# EAGLE board LCD-Header-2pins (EAGLE 5.11)
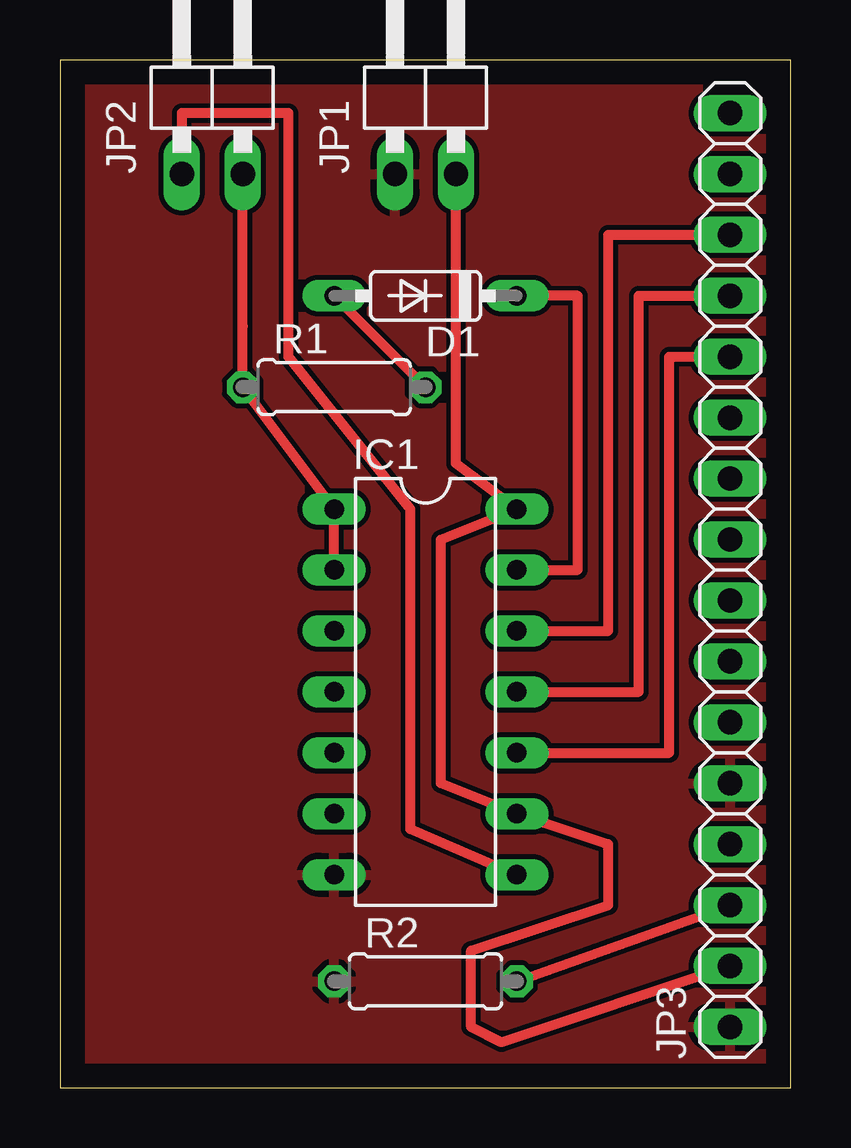
[diagram p0: board, top side]
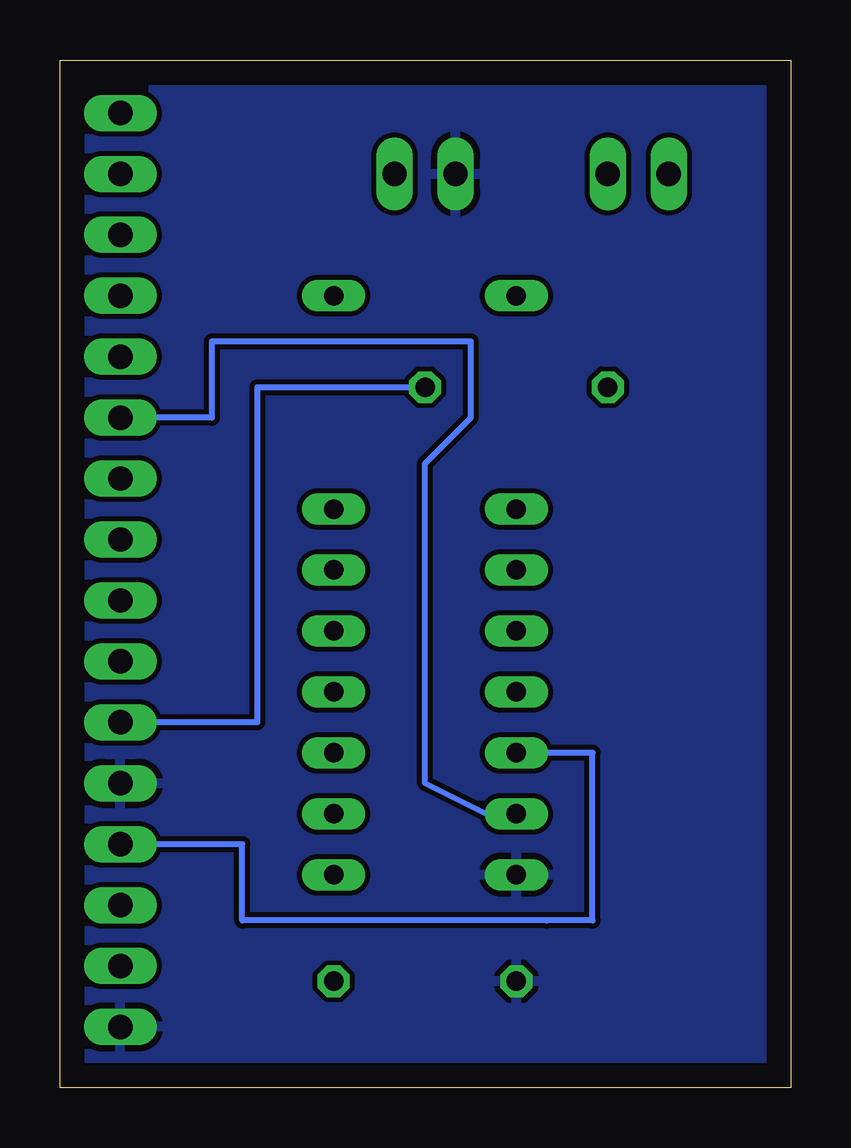
[diagram p1: board, bottom side, seen from below]

Size 30.46 x 42.85 mm. Coordinates in mm from the lower left corner, seen from the top.
Outline: 0,0 30.46,0 30.46,42.85 0,42.85 0,0
Copper layers (1*16): Top 0.035mm / dielectric 1.5mm / Bottom 0.035mm
Design rules "default": minimum track width 10mil, minimum drill 24mil, track to track 8mil, track to pad 8mil, pad to pad 8mil, via to via 8mil, smd to smd 8mil, copper to edge 40mil, drill to drill 8mil, minimum pad ring 10mil, minimum via ring 8mil, stop-mask expansion 4mil, vias tented up to drill 0mil, thermal gap 10mil

## Footprints (pad centres in the part's own frame; a part is rotated, then mirrored left to right if it is on the bottom)
DO35-7 = drill 0.813 long: A 3.81,0; C -3.81,0
DIL14 = drill 0.813 long: 1 -7.62,-3.81; 2 -5.08,-3.81; 3 -2.54,-3.81; 4 0,-3.81; 5 2.54,-3.81; 6 5.08,-3.81; 7 7.62,-3.81; 8 7.62,3.81; 9 5.08,3.81; 10 2.54,3.81; 11 0,3.81; 12 -2.54,3.81; 13 -5.08,3.81; 14 -7.62,3.81
1X02/90 = drill 1.016 long: 1 -2.54,-3.81; 2 0,-3.81
1X16 = drill 1.016 long: 1 -19.05,0; 2 -16.51,0; 3 -13.97,0; 4 -11.43,0; 5 -8.89,0; 6 -6.35,0; 7 -3.81,0; 8 -1.27,0; 9 1.27,0; 10 3.81,0; 11 6.35,0; 12 8.89,0; 13 11.43,0; 14 13.97,0; 15 16.51,0; 16 19.05,0
0207/7 = drill 0.813 octagon: 1 -3.81,0; 2 3.81,0

## Placement (x,y rotation side)
D1  1N4148DO35-7  [DO35-7]  15.24,33.02 180 top
IC1  74LS164N  [DIL14]  15.24,16.51 270 top
JP1  [1X02/90]  16.51,41.91 0 top
JP2  [1X02/90]  7.62,41.91 0 top
JP3  [1X16]  27.94,21.59 90 top
R1  1K  [0207/7]  11.43,29.21 0 top
R2  2K  [0207/7]  15.24,4.45 0 top

## Library data of the parts
D1 = diode
IC1 = 74xx-eu
JP1-JP3 = pinhead-2
R1 R2 = resistor

## Nets
CLK: IC1.8 JP2.1
DATA_ENABLE: IC1.1 IC1.2 JP2.2 R1.1
GND: IC1.7 JP1.1 JP3.1 JP3.5 R2.1
N$1: D1.A JP3.6 R1.2
N$2: JP3.3 R2.2
N$4: D1.C IC1.13
N$5: IC1.12 JP3.14
N$6: IC1.11 JP3.13
N$7: IC1.10 JP3.12
N$8: IC1.6 JP3.11
N$9: IC1.5 JP3.4
VCC: IC1.9 IC1.14 JP1.2 JP3.2

## Tracks (layer width: path | path; a pad name or v marks a point on that pad's centre or on a via)
CLK
  Top 0.406: IC1.8 14.61,10.79 14.61,24.13 9.53,30.48 9.53,40.64 5.08,40.64 JP2.1
DATA_ENABLE
  Top 0.406: IC1.2 IC1.1 R1.1 7.62,31.75 JP2.2
GND
  pour Bottom: 0,43.18 30.48,43.18 30.48,0 0,0
  pour Top: 0,43.18 30.48,43.18 30.48,0 0,0
N$1
  Top 0.406: R1.2 D1.A
  Bottom 0.254: JP3.6 26.67,15.24 22.23,15.24 22.23,29.21 R1.2
N$2
  Top 0.406: R2.2 JP3.3
N$4
  Top 0.406: IC1.13 21.59,21.59 21.59,33.02 D1.C
N$5
  Top 0.406: IC1.12 22.86,19.05 22.86,35.56 JP3.14
N$6
  Top 0.406: IC1.11 24.13,16.51 24.13,33.02 JP3.13
N$7
  Top 0.406: IC1.10 25.4,13.97 25.4,30.48 JP3.12
N$8
  Bottom 0.254: IC1.6 12.7,11.43 15.24,12.7 15.24,26.04 13.34,27.94 13.34,31.11 19.05,31.11 24.13,31.11 24.13,27.94 26.67,27.94 JP3.11
N$9
  Bottom 0.254: IC1.5 10.16,13.97 8.26,13.97 8.26,6.99 10.16,6.99 22.86,6.99 22.86,10.16 26.67,10.16 JP3.4
VCC
  Top 0.406: JP1.2 16.51,31.75 16.51,26.04 IC1.14 15.88,22.86 15.88,12.7 IC1.9 22.86,10.16 22.86,7.62 17.14,5.71 17.14,2.54 18.41,1.91 JP3.2